# Altium PCB PCB1.PcbDoc
Units mm, origin at the board's own origin, x right, y up, seen from the top; angles counter-clockwise.
Board outline 128.55 x 76.31 mm, 2 copper layers (Top Layer, Bottom Layer), stack 1.534 mm thick; 39 components, 76 nets, 167 pads, 0 vias.
Unrouted connection lines stored in the file: 79.
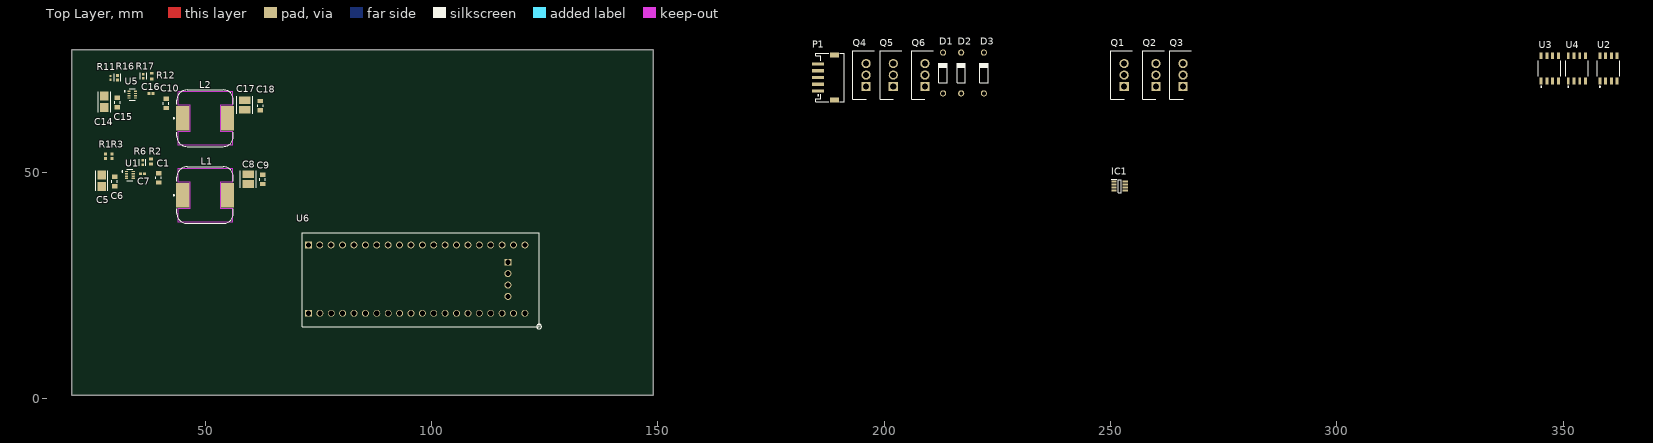
[diagram p0: Top Layer view]
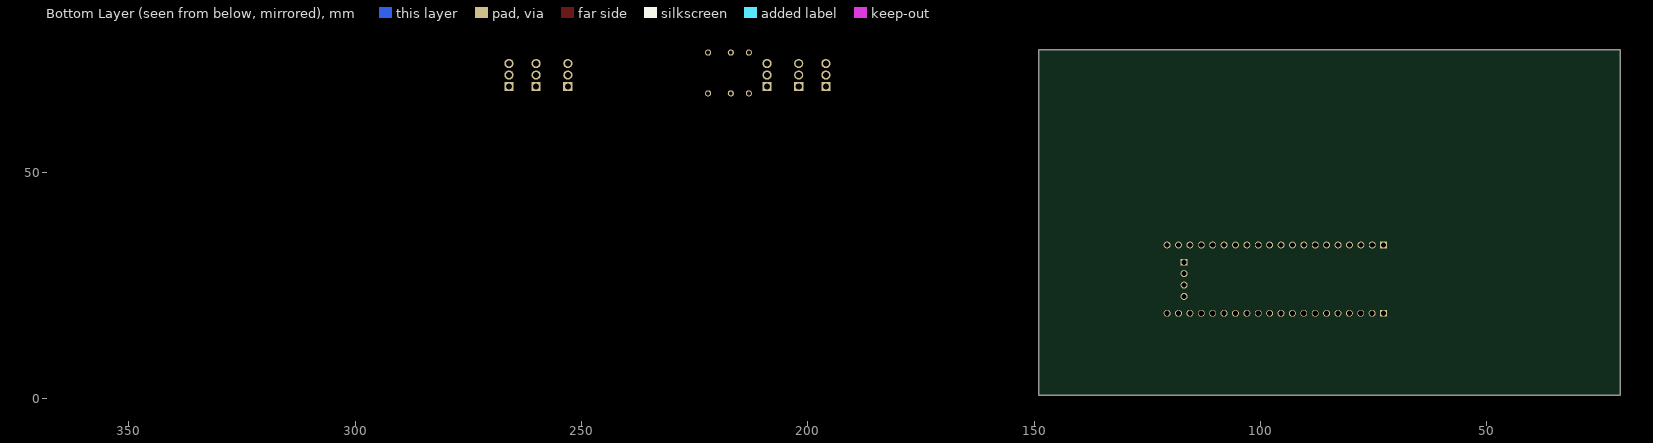
[diagram p1: Bottom Layer view, seen from below]

## Layer stack, top to bottom
Top Solder: solder mask 0.0127, Solder Resist, Dk 3.3
Top Layer: signal copper 0.0178
Dielectric1: core 1.4986, FR-4, Dk 4.3
Bottom Layer: signal copper 0.0178
Bottom Solder: solder mask 0.0127, Solder Resist, Dk 3.3

## Board outline
20.472,0.813 149.019,0.813 149.019,77.12 20.472,77.12

## Design rules (kind name [scope] priority, off if disabled: settings)
Clearance [All] p1: gap=0.254 ignorepadtopadclearanceinfootprint=FALSE
HoleSize [All] p1: absolutevalues=TRUE maxlimit=7.62 minlimit=0.254 maxpercent=80.000 minpercent=20.000
MinimumAnnularRing [All] p1: minimumring=0.254
PasteMaskExpansion [All] p1: expansion=0.254
PlaneClearance [All] p1: clearance=0.381
PlaneConnect [All] p1: pad.planeconnectstyle=Relief pad.reliefexpansion=0.508 pad.reliefentries=4 pad.reliefconductorwidth=0.254 pad.reliefairgap=0.254 via.planeconnectstyle=Direct via.reliefexpansion=0.508 via.reliefentries=4 via.reliefconductorwidth=0.254 via.reliefairgap=0.254
PolygonConnect [All] p1: thpad.connectstyle=Relief thpad.reliefconductorwidth=0.254 thpad.reliefentries=4 thpad.polygonreliefangle="90 Angle" thpad.airgapwidth=0.254 smdpad.connectstyle=Relief smdpad.reliefconductorwidth=0.254 smdpad.reliefentries=4 smdpad.polygonreliefangle="90 Angle" smdpad.airgapwidth=0.254 via.connectstyle=Direct via.reliefconductorwidth=0.254 via.reliefentries=4 via.polygonreliefangle="90 Angle" via.airgapwidth=0.254
RoomDefinition Sheet1 [InComponentClass('Sheet1')] p1: confinementstyle=ConfineIn formatcopy=TRUE lockcomponents=FALSE outline 156,22 363,22 363,81 156,81
RoutingVias [All] p1: holewidth=0.254 width=0.508 viastyle="Through Hole" minholewidth=0.254 minwidth=0.508 maxholewidth=0.254 maxwidth=0.508
SMDNeckDown [All] p1: percent=100.000
SilkToSolderMaskClearance SilkscreenOverComponentPads [IsPad] p1: minsilkscreentomaskgap=0.254 clearancetoexposedcopper=TRUE
SolderMaskExpansion [All] p1: expansion=0.254 istentingtop=FALSE
Width [All] p1: maxlimit=0.254 minlimit=0.254 preferedwidth=0.254
25 further rules are at their usual default settings.

## Components (designator, comment, footprint, x,y, rotation, side; value= is the part's Value field where it differs from the comment)
C1 "100n" FP-CGA3E-0_3-0_1-IPC_A 39.69,48.846 r270 top
C5 "10u" FP-C3216-160-0_2-IPC_A 27.152,48.197 r270 top
C6 "100n" FP-CGA3E-0_3-0_1-IPC_A 30,48.022 r270 top
C7 "33n" CAPC1005X55X25NL05T10 36.103,49.722 r180 top
C8 "47u" FP-GRM32E-0_3-0_2-IPC_C 59.5,48.543 r90 top
C9 "100n" FP-CGA3E-0_3-0_1-IPC_A 62.706,48.486 r90 top
C10 "100n" FP-CGA3E-0_3-0_1-IPC_A 41.35,65.273 r270 top
C14 "10u" FP-C3216-160-0_2-IPC_A 27.734,65.625 r270 top
C15 "100n" FP-CGA3E-0_3-0_1-IPC_A 30.603,65.469 r270 top
C16 "33n" CAPC1005X55X25NL05T10 38,67.472 r180 top
C17 "47u" FP-GRM32E-0_3-0_2-IPC_C 58.739,64.9 r90 top
C18 "100n" FP-CGA3E-0_3-0_1-IPC_A 62.206,64.773 r90 top
D1 "1N4148" NXP-SOD27-2_V 213,72 r90 top
D2 "1N4148" NXP-SOD27-2_V 217,72 r90 top
D3 "1N4148" NXP-SOD27-2_V 222,72 r90 top
IC1 "INA236BIDDFR" SOT65P280X110-8N 252,47 r0 top
L1 "15u" WE-PD_1210 50,45 r270 top
L2 "10u" WE-PD_1210 50,62 r270 top
P1 "648105131822" 648105131822 188,71 r90 top
Q1 "IPP015N04NF2SAKMA1" TO254P475X1028X1996-3P 253,69 r90 top
Q2 "IPP015N04NF2SAKMA1" TO254P475X1028X1996-3P 260,69 r90 top
Q3 "IPP015N04NF2SAKMA1" TO254P475X1028X1996-3P 266,69 r90 top
Q4 "IPP015N04NF2SAKMA1" TO254P475X1028X1996-3P 196,69 r90 top
Q5 "IPP015N04NF2SAKMA1" TO254P475X1028X1996-3P 202,69 r90 top
Q6 "IPP015N04NF2SAKMA1" TO254P475X1028X1996-3P 209,69 r90 top
R1 "374k" RESC1005X40X25ML05T05 28,53.635 r270 top
R2 "140k" RESC1609X50X30LL10T20 38,52.445 r270 top
R3 "34k8" RESC1005X40X25ML05T05 29.397,53.635 r270 top
R6 "10k" FP-CRCW0402-e3-IPC_B 36.165,52.222 r90 top
R11 "536k" RESC1005X40X25LL05T05 29.13,70.897 r90 top
R12 "52k3" RESC1608X55X25LL10T15 38.2,71.297 r90 top
R16 "107k" FP-CRCW0402-e3-IPC_A 30.603,70.972 r90 top
R17 "10k" FP-CRCW0402-e3-IPC_B 36.353,71.297 r90 top
U1 "TPS62932DRLR" FP-DRL0008A-MFG 33.366,49.472 r0 top
U2 "IRS2001SPBF" FP-PG-DSO-8-MFG 360,73 r90 top
U3 "IRS2001SPBF" FP-PG-DSO-8-MFG 347,73 r90 top
U4 "IRS2001SPBF" FP-PG-DSO-8-MFG 353,73 r90 top
U5 "TPS62932DRLR" FP-DRL0008A-MFG 33.866,67.222 r0 top
U6 "STM32F411CEU6 Blackpill" "STM32F411CEU6 Blackpill-Footprint-1" 99.154,24.888 r0 top

## Footprints (in the part's own frame and the unit in brackets; to place one, negate y for a bottom-side part, rotate by r counter-clockwise, add the part's x,y. Pads: shape width x height; smd on the part's side, far side on the other; paste and mask are expansions set on the pad)
648105131822 [mm] "1.50mm SMT Male Horizontal Shrouded Header, 5p"
  rect 0.7x2.6 smd: 1(-3,2.65) 2(-1.5,2.65) 3(0,2.65) 4(1.5,2.65) 5(3,2.65)
  rect 1.1x1.9 smd: MP1(-4.95,-1) MP2(4.95,-1)
  silkscreen extent -5.4,-3.13 5.4,3.13, body extent -5.35,-3 5.35,3.47, height 3.74
CAPC1005X55X25NL05T10 [mm] "Chip Capacitor, 2-Leads, Body 1.00x0.50mm, IPC Medium Density"
  rect 0.66x0.62 smd: 1(-0.44,0) 2(0.44,0)
  body extent -0.53,-0.28 0.53,0.27, height 0.55
FP-C3216-160-0_2-IPC_A [mm]
  rect 1.954x1.906 smd paste+0 mask+0: 1(-1.276,0) 2(1.276,0)
  silkscreen extent -2.25,-1.35 2.25,1.35, body extent -2.75,-1.45 2.75,1.45, height 0.25
FP-CGA3E-0_3-0_1-IPC_A [mm]
  rect 0.956x1.206 smd paste+0 mask+0: 1(-1.025,0) 2(1.025,0)
  silkscreen extent -0.25,-0.6 0.25,0.6, body extent -2,-1.1 2,1.1, height 0.25
FP-CRCW0402-e3-IPC_A [mm]
  rect 0.668x0.672 smd paste+0 mask+0: 1(-0.502,0) 2(0.502,0)
  silkscreen extent -0.84,-0.74 0.84,0.74, body extent -1.04,-0.54 1.04,0.54, height 0.25
FP-CRCW0402-e3-IPC_B [mm]
  rect 0.568x0.572 smd paste+0 mask+0: 1(-0.452,0) 2(0.452,0)
  silkscreen extent -0.74,-0.69 0.74,0.69
FP-DRL0008A-MFG [mm]
  rrect33% 0.67x0.3 smd paste+0 mask+0: 1(-0.74,0.75) 2(-0.74,0.25) 3(-0.74,-0.25) 4(-0.74,-0.75) 5(0.74,-0.75) 6(0.74,-0.25) 7(0.74,0.25) 8(0.74,0.75)
  silkscreen extent -1.77,-1.28 0.65,1.28, body extent -1.17,-1.35 1.17,1.35, height 0.25
FP-GRM32E-0_3-0_2-IPC_C [mm]
  rect 1.703x2.606 smd paste+0 mask+0: 1(-1.051,0) 2(1.051,0)
  silkscreen extent -1.9,-1.75 1.9,1.75, body extent -2,-1.45 2,1.45, height 0.25
FP-PG-DSO-8-MFG [mm]
  rect 1.45x0.65 smd paste+0 mask+0: 1(-2.775,1.905) 2(-2.775,0.635) 3(-2.775,-0.635) 4(-2.775,-1.905) 5(2.775,-1.905) 6(2.775,-0.635) 7(2.775,0.635) 8(2.775,1.905)
  silkscreen extent -4.17,-2.49 1.68,2.49, body extent -3.6,-2.59 3.6,2.59, height 0.25
NXP-SOD27-2_V [mm] "SOD27, 2-Leads, Dia 1.85mm, Body Length 4.25mm, Pin Spacing 9mm"
  round 1.35 hole 0.85: 1(-4.5,0) 2(4.5,0)
  silkscreen extent -2.12,-0.92 2.13,0.93, body extent -4.78,-0.93 4.78,0.92, height 1.85
RESC1005X40X25LL05T05 [mm] "Chip Resistor, 2-Leads, Body 1.00x0.50mm, IPC High Density"
  rect 0.45x0.45 smd: 1(-0.4,0) 2(0.4,0)
  body extent -0.53,-0.27 0.53,0.28, height 0.4
RESC1005X40X25ML05T05 [mm] "Chip Resistor, 2-Leads, Body 1.00x0.50mm, IPC Low Density"
  rect 0.65x0.65 smd: 1(-0.5,0) 2(0.5,0)
  body extent -0.53,-0.27 0.53,0.28, height 0.4
RESC1608X55X25LL10T15 [mm] "Chip Resistor, 2-Leads, Body 1.60x0.80mm, IPC High Density"
  rect 0.6x0.8 smd: 1(-0.65,0) 2(0.65,0)
  body extent -0.85,-0.45 0.85,0.45, height 0.55
RESC1609X50X30LL10T20 [mm] "Chip Resistor, 2-Leads, Body 1.55x0.85mm, IPC High Density"
  rect 0.7x0.85 smd: 1(-0.575,0) 2(0.575,0)
  body extent -0.82,-0.48 0.82,0.48, height 0.5
SOT65P280X110-8N [mm]
  rect 1.2x0.45 smd: 1(-1.25,0.975) 2(-1.25,0.325) 3(-1.25,-0.325) 4(-1.25,-0.975) 5(1.25,-0.975) 6(1.25,-0.325) 7(1.25,0.325) 8(1.25,0.975)
  silkscreen extent -1.85,-1.45 0.3,1.55, body extent -1.4,-1.45 1.4,1.45, height 1.1
"STM32F411CEU6 Blackpill-Footprint-1" [mil]
  round 60 hole 44.88: 1(844.92,-235.33) 2(745.87,-235.33) 3(646.83,-235.33) 4(547.78,-235.33) 5(448.73,-235.33) 6(349.69,-235.33) 7(250.64,-235.33) 8(151.59,-235.33) 9(52.55,-235.33) 10(-46.5,-235.33) 11(-145.55,-235.33) 12(-244.59,-235.33) 13(-343.64,-235.33) 14(-442.69,-235.33) 15(-541.73,-235.33) 16(-640.78,-235.33) 17(-739.83,-235.33) 18(-838.87,-235.33) 19(-937.92,-235.33) 22(-939.02,358.76) 23(-839.89,358.76) 24(-740.76,358.76) 25(-641.63,358.76) 26(-542.5,358.76) 27(-443.37,358.76) 28(-344.24,358.76) 29(-245.11,358.76) 30(-145.98,358.76) 31(-46.85,358.76) 32(52.28,358.76) 33(151.41,358.76) 34(250.54,358.76) 35(349.67,358.76) 36(448.8,358.76) 37(547.93,358.76) 38(647.06,358.76) 39(746.19,358.76) 40(845.31,358.76) 42(697.68,109.94) 43(697.68,10.33) 44(697.68,-88.48)
  rect 60x60 hole 44.88: 20(-1038.15,-235.33) 21(-1038.15,358.76) 41(697.68,208.37)
  silkscreen extent -1093,-372 990,467, body extent -1118,-378 1107,457, height 319
TO254P475X1028X1996-3P [mm]
  rect 2.025x2.025 hole 1.35: 1(0,0)
  round 2.025 hole 1.35: 2(2.54,0) 3(5.08,0)
  silkscreen extent -2.8,-1.83 7.88,2.92, body extent -2.6,-1.83 7.68,2.92, height 19.96
WE-PD_1210 [mm] "SMT Shielded Power Inductor, 2-leads, body 12x12mm"
  rect 5.4x2.9 smd: 1(0,-4.95) 2(0,4.95)
  Top Layer keep-out region: -6,6 -2.9,6 -2.9,3.3 2.9,3.3 2.9,6 6,6 6,-6 2.9,-6 2.9,-3.3 -2.9,-3.3 -2.9,-6 -6,-6
  silkscreen extent -6.25,-7.02 6.25,6.25, body extent -6,-6 6,6, height 9.46

## Part data
C1 C6 C9 C10 C15 C18: library part CMP-2000-07546-2, "Cap Ceramic 100nF 50V X7R 10% Pad SMD 0603 +125°C Automotive T/R / Fabrikantnr: CGA3E2X7R1H104K080AA", Capacitance=100nF, Case Code (Imperial)=0603, Case Code (Metric)=1608, Dielectric=X7R, Max Operating Temperature=125°C, Min Operating Temperature=-55°C, Package Quantity=1, Ratings=AEC-Q200, Tolerance=10%, Voltage=50V, Case/Package=0603, Composition=Ceramic, Depth=0.8mm, Height=0.8mm, Lead Free="Lead Free", Length=1.6mm, Mount="Surface Mount", Packaging="Tape and Reel", Radiation Hardening=No, REACH SVHC="No SVHC", Termination=SMD/SMT, Thickness=0.035inch, Voltage Rating=50V, Voltage Rating (DC)=50V, Weight=7.1E-05oz, Width=0.8mm
C5 C14: library part CMP-2000-06045-2, "Multilayer Ceramic Capacitors 10uF ±10% 50V X5R SMD 1206 / Mouser Fabrikantnr: C3216X5R1H106K160AB", Capacitance=10uF, Case Code (Imperial)=1206, Case Code (Metric)=3216, Dielectric=X5R, Dielectric Material=Ceramic, Max Operating Temperature=85°C, Min Operating Temperature=-55°C, Package Quantity=1, Tolerance=10%, Voltage=50V, Case/Package=1206, Construction=Flat, Depth=1.6mm, Height=1.6mm, Lead Free="Lead Free", Length=3.2mm, Mount="Surface Mount", Packaging="Tape and Reel", Radiation Hardening=No, REACH SVHC="No SVHC", Resistor Type=Ceramic, RoHS Compliant=Yes, Series=C, Termination=SMD/SMT, Thickness=0.071inch, Voltage Rating=50V, Voltage Rating (DC)=50V, Weight=0.000571oz, Width=0.063inch
C7 C16: library part CMP-1034-01988-2, "33nF, 25VDC /  / Mouser Fabrikantnr: GRM155R71E333KA88D", Manufacturer=Murata, Part Number=GRM155R71E333KA88D
C8 C17: library part CMP-2000-06362-2, "CAP CER 47UF 16V X5R 1210 / Fabrikantnr: GRM32ER61C476KE15L", Capacitance=47uF, Case Code (Imperial)=1210, Case Code (Metric)=3225, Dielectric=X5R, Max Operating Temperature=85°C, Min Operating Temperature=-55°C, Package Quantity=1, Tolerance=10%, Voltage=16V, Case/Package=1210, Depth=2.5mm, Height=2.5mm, Lead Free="Lead Free", Length=3.2mm, Material=Ceramic, Mount="Surface Mount", Number of Pins=2, Packaging="Cut Tape", Radiation Hardening=No, REACH SVHC="No SVHC", RoHS Compliant=Yes, Termination=SMD/SMT, Thickness=0.106inch, Voltage Rating=16V, Voltage Rating (DC)=16V, Width=0.098inch
D1 D2 D3: library part CMP-004-00000-2, "High Speed Diode, 100 V, 0.45 A, -65 to 175 degC, 2-Pin SOD27, RoHS, Bulk", Case/Package=DO, Forward Current=300mA, Forward Voltage=1V, Manufacturer=Fairchild, Max Operating Temperature=175°C, Max Surge Current=4A, Min Operating Temperature=-65°C, Package Quantity=2000, Package Reference=SOD27, Peak Reverse Current=5uA, Power=500mW, Datasheet URL=http://www.nxp.com/documents/data_sheet/1N4148_1N4448.pdf, Datasheet Version=Aug-04, Diameter=1.91mm, Elements=1, Manufacturer URL=https://www.fairchildsemi.com/, Package URL=http://www.nxp.com/documents/data_sheet/1N4148_1N4448.pdf, Packaging=Bulk, Pins=2, Recovery Time=4ns, RoHS Compliant=True
IC1: "Integrated Circuit", Manufacturer_Name="Texas Instruments", Mouser Part Number=595-INA236BIDDFR, Datasheet Link=https://www.ti.com/general/docs/suppproductinfo.tsp?distId=26&gotoUrl=https://www.ti.com/lit/gpn/ina236, Height=1.1mm, Manufacturer_Part_Number=INA236BIDDFR, Mouser Price/Stock=https://www.mouser.co.uk/ProductDetail/Texas-Instruments/INA236BIDDFR?qs=17ckDYBRdelpXu8anct71w%3D%3D
L1: library part CMP-0227-00106-2, "Vermogensinductoren - SMD WE-PD 15uH 6.5A  / Mosuer Fabrikantnr: 7447709150", Ambient Temperature Range High=85°C, Ambient Temperature Range Low=-40°C, Case Code (Imperial)=1210, Case Code (Metric)=3225, Case/Package=Nonstandard, Current Rating=6.5A, DC Resistance (DCR)=21mΩ, Inductance=15µH, Inductance Tolerance=20%, Max Operating Temperature=125°C, Resistance=26mΩ, Saturation Current=8A, Self Resonant Frequency=17MHz, Test Frequency=1kHz, Composition=Wirewound, Core Material=Ferrite, Depth=12mm, Height=10mm, Height - Seated (Max)=10.0076mm, Lead Free="Lead Free", Lead Pitch=7mm, Length=12mm, Max DC Current=6.5A, Min Operating Temperature=-40°C, Mount="Surface Mount", NexarPartId=8917162, Number of Pins=2, Packaging="Cut Tape (CT)", REACH SVHC=Unknown, RMS Current (Irms)=6.5A, RoHS=Compliant, Series Resistance=26mΩ, Shielding=Shielded, Termination=SMD/SMT, Tolerance=20%, Weight=9.071847g, Width=12mm
L2: library part CMP-0227-00034-2, "Vermogensinductoren - SMD WE-PD 10uH 7.1A /  / Fabrikantnr: 7447709100", Ambient Temperature Range High=85°C, Ambient Temperature Range Low=-40°C, Case Code (Imperial)=1210, Case Code (Metric)=3225, Case/Package=Nonstandard, Current Rating=7.1A, DC Resistance (DCR)=13mΩ, Inductance=10µH, Inductance Tolerance=20%, Max Operating Temperature=125°C, Resistance=21mΩ, Saturation Current=10.5A, Self Resonant Frequency=21MHz, Test Frequency=1kHz, Composition=Wirewound, Core Material=Ferrite, Depth=12mm, Height=10mm, Height - Seated (Max)=10.0076mm, Lead Free="Lead Free", Lead Pitch=7mm, Length=12mm, Max DC Current=7.1A, Min Operating Temperature=-40°C, Mount="Surface Mount", NexarPartId=21642419, Number of Pins=2, Packaging="Tape & Reel (TR)", REACH SVHC=Unknown, RMS Current (Irms)=7.1A, RoHS=Compliant, Series Resistance=21mΩ, Shielding=Shielded, Termination=SMD/SMT, Tolerance=20%, Weight=4.535924g, Width=12mm
P1: library part CMP-1502-00733-2, Color="Beige, White", Contact Resistance=20mΩ, Current Rating=1A, Flammability Rating="UL94 V-0", Insulation Resistance=500MΩ, Max Operating Temperature=85°C, Min Operating Temperature=-25°C, Operating Supply Voltage=50V, Connector Type="Male Pin", Contact Gender=Male, Contact Material=Copper, Contact Plating=Tin, Gender=Male, Height=3.7mm, Housing Material=Nylon, Lead Pitch=1.5mm, Length=10.5mm, Mount="Surface Mount", NexarPartId=18818254, Number of Contacts=5, Number of Pins=5, Number of Positions=5, Number of Rows=1, Packaging="Tape and Reel", Pitch=1.5mm, REACH SVHC=Unknown, RoHS=Compliant, Termination=Solder, Voltage Rating=50V, Width=10.5mm
Q1 Q2 Q3 Q4 Q5 Q6: "MOSFET (N-Channel)", Manufacturer_Name=Infineon, Mouser Part Number=726-IPP015N04NF2SAKM, Arrow Part Number=IPP015N04NF2SAKMA1, Arrow Price/Stock=https://www.arrow.com/en/products/ipp015n04nf2sakma1/infineon-technologies-ag?region=nac, Datasheet Link=https://www.mouser.it/datasheet/2/196/Infineon_IPP015N04NF2S_DataSheet_v02_00_EN-3164869.pdf, Height=4.75mm, Manufacturer_Part_Number=IPP015N04NF2SAKMA1, Mouser Price/Stock=https://www.mouser.co.uk/ProductDetail/Infineon-Technologies/IPP015N04NF2SAKMA1?qs=By6Nw2ByBD2rHCf0vCszHQ%3D%3D
R1: library part CMP-2002-08555-1, "374k / Fabrikantnr: / CRCW0402374KFKED", Manufacturer="Vishay Dale", Part Number=CRCW0402374KFKED
R2: library part CMP-2000-03900-1, "Mosuer Fabrikantnr: CRCW0603140KFKEA", Manufacturer="Vishay Dale", Part Number=CRCW0603140KFKEA
R3: library part CMP-1011-00683-2, "34k8 / Fabrikantnr: / CRCW040234K8FKED", Manufacturer="Vishay Dale", Part Number=CRCW040234K8FKED
R6 R17: library part CMP-2002-08135-2, "RES SMD 10K OHM 1% 1/16W 0402 / Fabrikantnr: CRCW040210K0FKED", Case Code (Imperial)=0402, Case Code (Metric)=1005, Max Operating Temperature=155°C, Max Power Dissipation=63mW, Min Operating Temperature=-55°C, Package Quantity=10, Resistance=10kR, Temperature Coefficient=100ppm/°C, Tolerance=1%, Voltage Rating=50V, Case/Package=0402, Composition="Thick Film", Contact Plating=Tin, Depth=0.5mm, Features="Automotive AEC-Q200", Height=0.35mm, Lead Free="Lead Free", Length=1mm, Military Standard=Not, Mount="Surface Mount", Number of Pins=2, Number of Terminations=2, Packaging="Tape and Reel", Power Rating=63mW, Radiation Hardening=No, Termination=SMD/SMT, Voltage Rating (DC)=50V, Weight=2.3E-05oz, Width=0.02inch
R11: library part CMP-1011-00819-2, "536kohm / Mouser Fabrikantnr: CRCW0402536KFKED / CRCW0402536KFKED", Manufacturer="Vishay Dale", Part Number=CRCW0402536KFKED
R12: library part CMP-1012-00705-2, "Mouser Fabrikantnr: RC0603FR-0752K3L", Manufacturer=Yageo, Part Number=RC0603FR-0752K3L
R16: library part CMP-2002-08133-2, "RES Thick Film, 107kΩ, 1%, 0.063W, 100ppm/°C, 0402 / Fabrikantnr: / CRCW0402107KFKED", Case Code (Imperial)=0402, Case Code (Metric)=1005, Max Operating Temperature=155°C, Max Power Dissipation=63mW, Min Operating Temperature=-55°C, Package Quantity=10, Resistance=107kR, Temperature Coefficient=100ppm/°C, Tolerance=1%, Voltage Rating=50V, Case/Package=0402, Composition="Thick Film", Contact Plating=Tin, Depth=0.5mm, Features="Automotive AEC-Q200", Height=0.016inch, Lead Free="Lead Free", Length=1mm, Military Standard=Not, Number of Pins=2, Number of Terminations=2, Packaging="Tape and Reel", Power Rating=63mW, Radiation Hardening=No, Termination=SMD/SMT, Voltage Rating (DC)=50V, Weight=2.3E-05oz, Width=0.02inch
U1 U5: library part CMP-04918-000714-1, "3.8-V TO 30-V INPUT, 2-A, 200-KH"
U2 U3 U4: library part CMP-00196-65875172-1, "IRS2001SPBF Cut Tape (CT) IRS2001SPBF Half-Bridge 1996 gate driver 100ns -40C~150C TJ 290mA 600mA 625mW", Ambient Temperature Range High=125°C, Case/Package=DIP, Max Junction Temperature (Tj)=150°C, Max Output Current=600mA, Max Power Dissipation=625mW, Max Supply Current=270µA, Max Supply Voltage=20V, Min Operating Temperature=-40°C, Min Supply Voltage=10V, Nominal Supply Current=150µA, Output Current=130mA, Output Voltage=220V, Package Quantity=2500, Channel Type=Independent, Fall Time=35ns, Height=1.4986mm, Lead Free="Lead Free", Length=4.9784mm, Lifecycle Status=NRND, Max Operating Temperature=125°C, Mount="Surface Mount, Through Hole", NexarPartId=65875172, Number of Channels=2, Number Of Drivers=2, Number Of Outputs=2, Number of Pins=8, Operating Supply Current=270µA, Packaging="Tape & Reel", Power Dissipation=625mW, Propagation Delay=220ns, Radiation Hardening=No, REACH SVHC="No SVHC", Release Time=150ns, Rise Time=170ns, RoHS=Compliant, Schedule B="8542390000, 8542390000", Turn-Off Delay Time=150ns, Turn-On Delay Time=160ns, Weight=540.001716mg, Width=3.9878mm
U6: library part CMP-005-000000-4, "This simple development board for the STM32F411 is a great way to add a powerful STM chip to your next project.", Clock Frequency=32.768kHz, Frequency=72MHz, Max Supply Voltage=6V, Min Supply Voltage=2V, Nominal Supply Voltage=3.3V, Power=549mW, Design Item ID=CMP-020-00023-3, I/Os="48 pins", Mounting Technology=THT, Pins=48, RAM Size=64KiB, Source="Components - 24.03.24 - 20.50.SchLib"

## Nets (pads, with @x,y where several pads share a name; then routed paths per layer and width w, separated by ;. In a path a pad name is that pad's centre, name@x,y a point inside that pad or via, vN(x,y) a via of type N, cw(c..) or ccw(c..) an arc to the next point about the centre after c; other vN are vias at no path point)
24V: Q1.2 Q2.2 Q3.2
+5V: C17.1 C18.1 IC1.4 L2.2 P1.1 R12.2 U6.20 U6.38
+12: 
+12V: C8.1 C9.1 L1.2 R2.1 U2.1 U3.1 U4.1
+24V: C5.1 C6.1 C14.1 C15.1 R1.2 R11.2 U1.3 U5.3
GND: C5.2 C6.2 C7.1 C8.2 C9.2 C14.2 C15.2 C16.1 C17.2 C18.2 IC1.3 P1.5 R3.1 R6.2 R16.2 R17.2 U1.4 U2.4 U3.4 U4.4 U5.4 U6.19 U6.39 U6.44
NetC1_1: C1.1 U1.6
NetC1_2: C1.2 L1.1 U1.5
NetC7_2: C7.2 U1.7
NetC10_1: C10.1 U5.6
NetC10_2: C10.2 L2.1 U5.5
NetC16_2: C16.2 U5.7
NetC19_1: D1.2 U3.5
NetC19_2: Q1.3 Q4.2
NetC20_1: D2.2
NetC20_2: Q2.3 Q5.2
NetC21_1: D3.2 U2.5
NetC21_2: Q3.3 Q6.2
NetD1_1: D1.1
NetD2_1: D2.1
NetD3_1: D3.1
NetIC1_1: IC1.1
NetIC1_2: IC1.2
NetIC1_5: IC1.5
NetIC1_6: IC1.6 U6.37
NetIC1_8: IC1.8 U6.21
NetP1_2: P1.2 U6.36
NetP1_3: P1.3 U6.35
NetP1_4: P1.4 U6.34
NetQ1_1: Q1.1
NetQ2_1: Q2.1
NetQ3_1: Q3.1
NetQ4_1: Q4.1
NetQ4_3: Q4.3
NetQ5_1: Q5.1
NetQ5_3: Q5.3
NetQ6_1: Q6.1
NetQ6_3: Q6.3
NetR1_1: R1.1 R3.2 U1.2
NetR2_2: R2.2 R6.1 U1.8
NetR4_2: U3.2 U6.2
NetR5_2: U3.3 U6.12
NetR7_2: U2.2 U6.4
NetR8_2: U2.3 U6.33
NetR9_2: U4.2 U6.3
NetR10_2: U4.3 U6.14
NetR11_1: R11.1 R16.1 U5.2
NetR12_1: R12.1 R17.1 U5.8
NetR13_1: U3.8
NetR14_1: U4.8
NetR15_1: U2.8
NetR21_1: U3.7
NetR22_1: U4.7
NetR23_1: U2.7
NetU2_6: U2.6
NetU3_6: U3.6
NetU4_5: U4.5
NetU4_6: U4.6
NetU6_5: U6.5
NetU6_9: U6.9
NetU6_10: U6.10
NetU6_11: U6.11
NetU6_13: U6.13 U6.32
NetU6_15: U6.15
NetU6_16: U6.16
NetU6_22: U6.22
NetU6_23: U6.23
NetU6_24: U6.24
NetU6_25: U6.25
NetU6_26: U6.26
NetU6_27: U6.27
NetU6_28: U6.28
NetU6_29: U6.29
NetU6_30: U6.30
NetU6_31: U6.31
NetU6_42: U6.42 U6.43
pads on no net: IC1.7 P1.MP1 P1.MP2 U1.1 U5.1 U6.1 U6.6 U6.7 U6.8 U6.17 U6.18 U6.40 U6.41